# EAGLE board Shield_Engino (EAGLE 9.6.2)
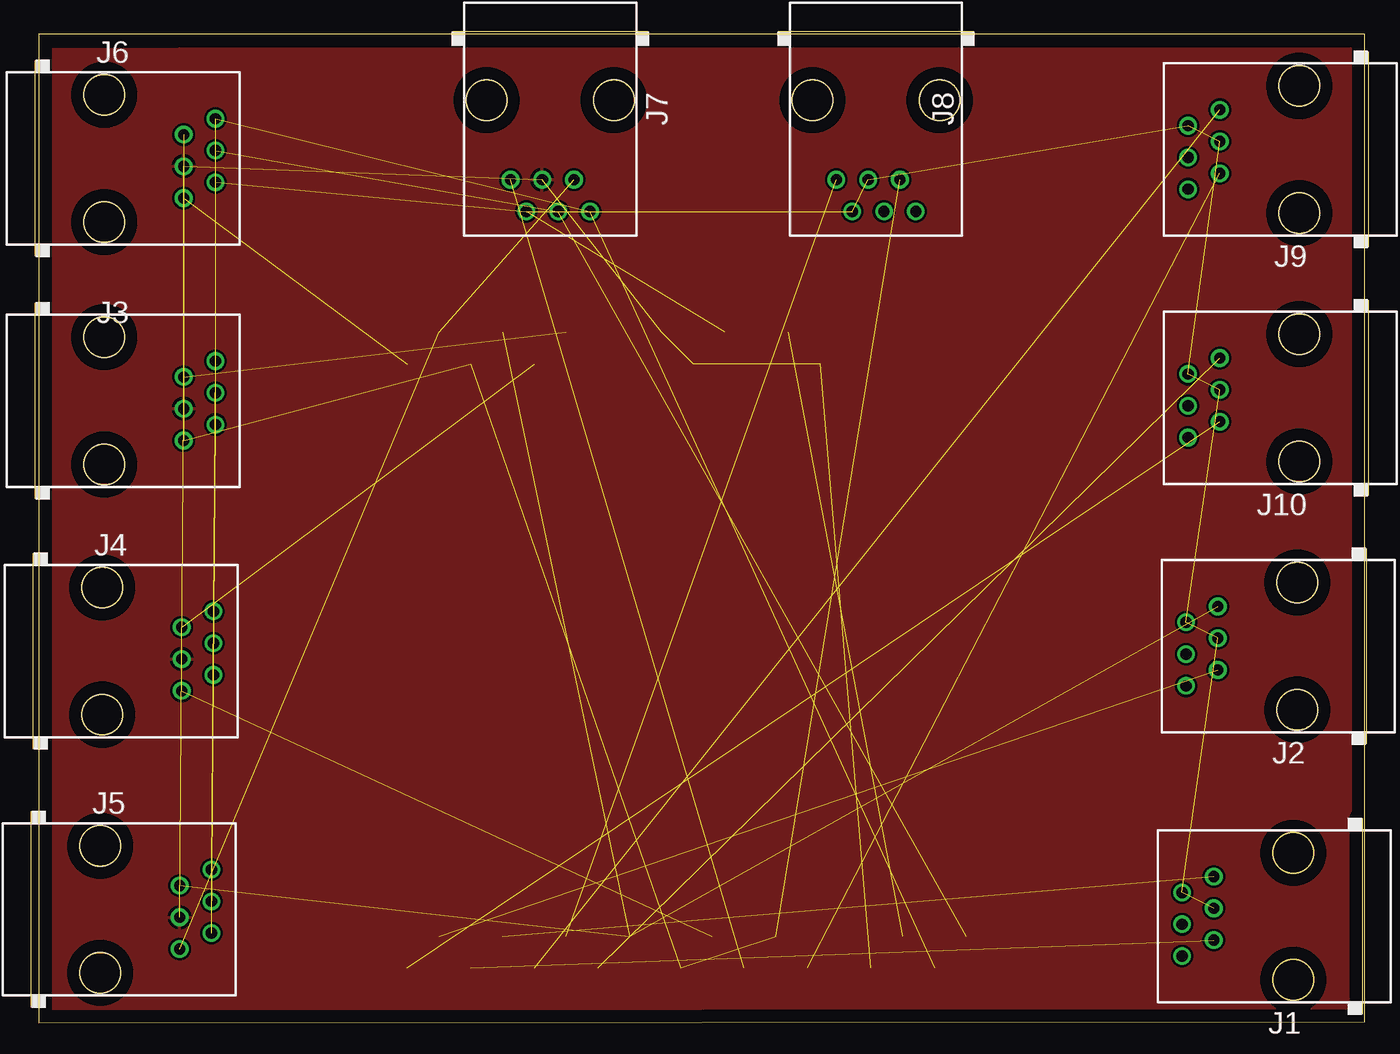
[diagram p0: board, top side]
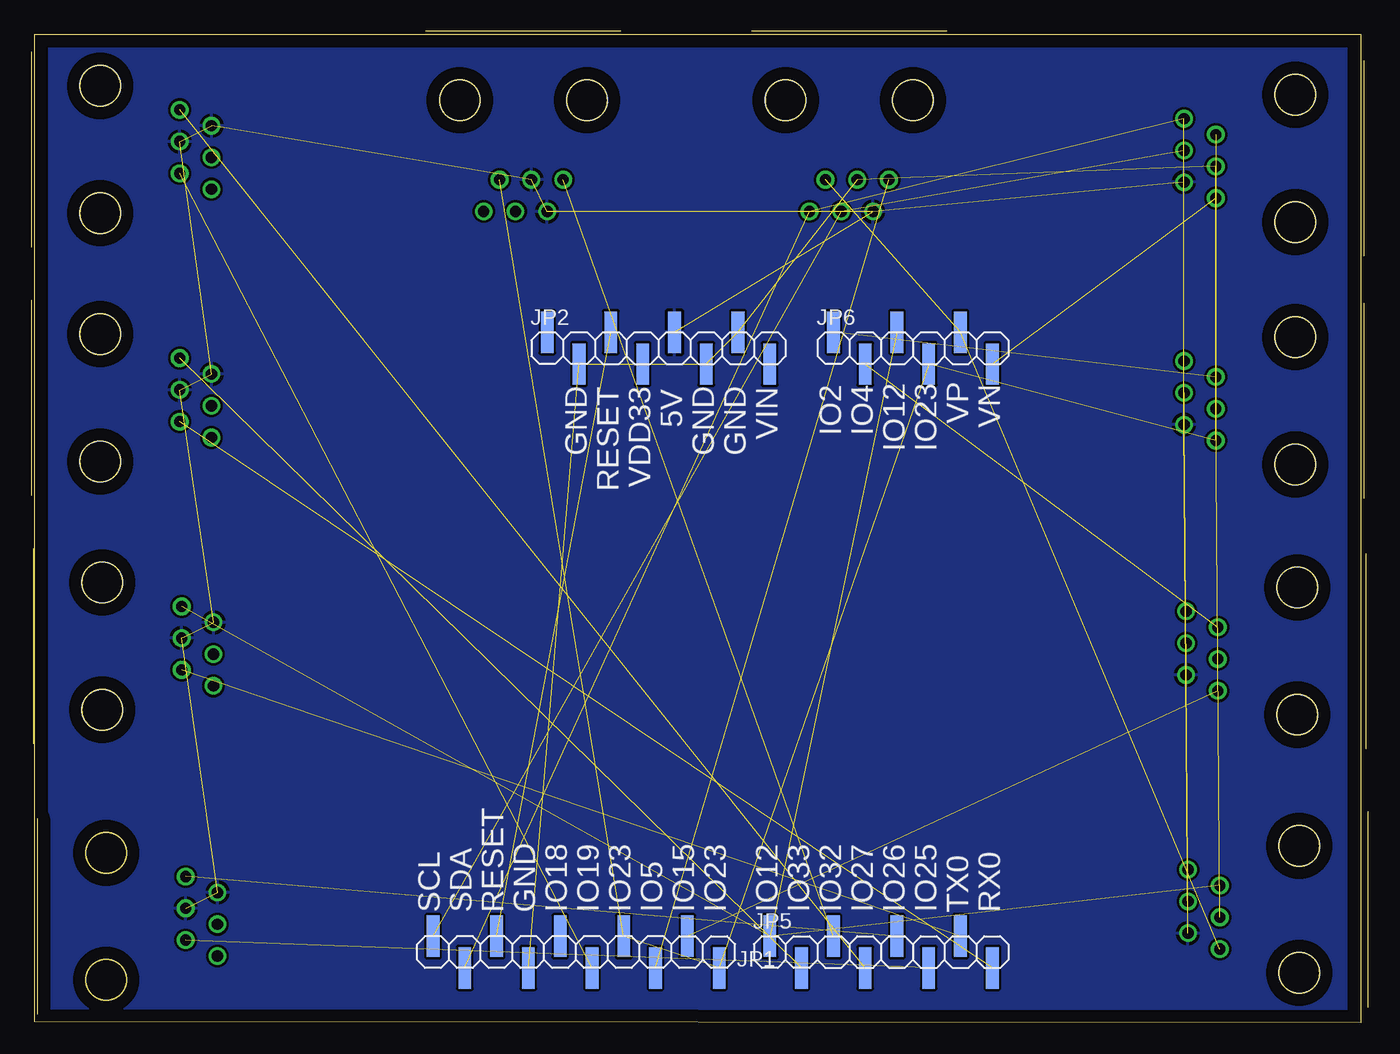
[diagram p1: board, bottom side, seen from below]

Size 105.94 x 78.99 mm. Coordinates in mm from the lower left corner, seen from the top.
Outline: 99.11,44.69 99.12,44.58 99.14,44.48 99.17,44.38 99.2,44.27 99.24,44.18 99.29,44.08 99.35,43.99 99.41,43.9 99.47,43.81 99.54,43.73 99.61,43.66 99.69,43.59 99.78,43.52 99.87,43.47 99.96,43.41 100.05,43.37 100.15,43.32 100.25,43.29 100.36,43.26 100.46,43.24 100.57,43.23 100.67,43.22 100.78,43.22 100.89,43.23 100.99,43.24 101.1,43.26 101.2,43.29 101.3,43.32 101.4,43.37 101.49,43.41 101.59,43.47 101.67,43.52 101.76,43.59 101.84,43.66 101.91,43.73 101.98,43.81 102.05,43.9 102.11,43.99 102.16,44.08 102.21,44.18 102.25,44.27 102.28,44.38 102.31,44.48 102.33,44.58 102.35,44.69 102.35,44.79 102.35,44.9 102.35,45.01 102.33,45.11 102.31,45.22 102.28,45.32 102.25,45.42 102.21,45.52 102.16,45.61 102.11,45.71 102.05,45.8 101.98,45.88 101.91,45.96 101.84,46.03 101.76,46.1 101.67,46.17 101.59,46.23 101.49,46.28 101.4,46.33 101.3,46.37 101.2,46.4 101.1,46.43 100.99,46.45 100.89,46.47 100.78,46.47 100.67,46.47 100.57,46.47 100.46,46.45 100.36,46.43 100.25,46.4 100.15,46.37 100.05,46.33 99.96,46.28 99.87,46.23 99.78,46.17 99.69,46.1 99.61,46.03 99.54,45.96 99.47,45.88 99.43,45.82 99.41,45.8 99.35,45.71 99.29,45.61 99.24,45.52 99.2,45.42 99.17,45.32 99.14,45.22 99.12,45.11 99.11,45.01 99.1,44.9 99.1,44.79 99.11,44.69
Outline: 99.11,44.69 99.11,44.69
Outline: 5.91,72.66 5.81,72.61 5.71,72.58 5.61,72.55 5.5,72.53 5.4,72.52 5.29,72.51 5.19,72.51 5.08,72.52 4.97,72.53 4.87,72.55 4.77,72.58 4.67,72.61 4.57,72.66 4.47,72.7 4.38,72.76 4.29,72.82 4.21,72.88 4.13,72.95 4.05,73.03 3.98,73.11 3.92,73.19 3.86,73.28 3.8,73.37 3.76,73.47 3.72,73.56 3.68,73.66 3.65,73.77 3.63,73.87 3.62,73.98 3.61,74.08 3.61,74.19 3.62,74.3 3.63,74.4 3.65,74.51 3.68,74.61 3.72,74.71 3.76,74.81 3.8,74.9 3.86,75 3.92,75.08 3.98,75.17 4.05,75.25 4.13,75.32 4.21,75.39 4.29,75.46 4.38,75.52 4.47,75.57 4.57,75.62 4.62,75.64 4.67,75.66 4.77,75.69 4.87,75.72 4.97,75.74 5.08,75.76 5.19,75.76 5.29,75.76 5.4,75.76 5.5,75.74 5.61,75.72 5.71,75.69 5.81,75.66 5.91,75.62 6,75.57 6.1,75.52 6.19,75.46 6.27,75.39 6.35,75.32 6.43,75.25 6.5,75.17 6.56,75.08 6.62,75 6.67,74.9 6.72,74.81 6.76,74.71 6.79,74.61 6.82,74.51 6.84,74.4 6.86,74.3 6.86,74.19 6.86,74.08 6.86,73.98 6.84,73.87 6.82,73.77 6.79,73.66 6.76,73.56 6.72,73.47 6.67,73.37 6.62,73.28 6.56,73.19 6.5,73.11 6.43,73.03 6.35,72.95 6.27,72.88 6.19,72.82 6.1,72.76 6,72.7 5.91,72.66
Outline: 5.29,2.38 5.19,2.36 5.08,2.35 4.97,2.34 4.87,2.34 4.76,2.35 4.66,2.36 4.55,2.38 4.45,2.41 4.35,2.45 4.25,2.49 4.15,2.54 4.06,2.59 3.97,2.65 3.89,2.71 3.81,2.78 3.73,2.86 3.66,2.94 3.6,3.02 3.54,3.11 3.49,3.2 3.44,3.3 3.4,3.4 3.37,3.5 3.34,3.6 3.32,3.7 3.3,3.81 3.3,3.92 3.3,4.02 3.3,4.13 3.32,4.23 3.34,4.34 3.37,4.44 3.4,4.54 3.44,4.64 3.49,4.74 3.54,4.83 3.6,4.92 3.66,5 3.73,5.08 3.81,5.16 3.89,5.23 3.97,5.29 4.06,5.35 4.15,5.4 4.25,5.45 4.35,5.49 4.45,5.53 4.55,5.55 4.66,5.57 4.76,5.59 4.87,5.59 4.97,5.59 5.08,5.59 5.19,5.57 5.29,5.55 5.39,5.53 5.49,5.49 5.59,5.45 5.69,5.4 5.78,5.35 5.87,5.29 5.95,5.23 6.03,5.16 6.11,5.08 6.18,5 6.24,4.92 6.3,4.83 6.36,4.74 6.4,4.64 6.44,4.54 6.48,4.44 6.5,4.34 6.53,4.23 6.54,4.13 6.55,4.02 6.55,3.92 6.54,3.81 6.53,3.7 6.5,3.6 6.48,3.5 6.44,3.4 6.4,3.3 6.36,3.2 6.3,3.11 6.24,3.02 6.18,2.94 6.11,2.86 6.03,2.78 5.95,2.71 5.87,2.65 5.78,2.59 5.69,2.54 5.59,2.49 5.49,2.45 5.39,2.41 5.29,2.38
Outline: 5.91,62.49 5.81,62.45 5.71,62.42 5.61,62.39 5.5,62.37 5.4,62.36 5.29,62.35 5.19,62.35 5.08,62.36 4.97,62.37 4.87,62.39 4.77,62.42 4.67,62.45 4.57,62.49 4.47,62.54 4.38,62.59 4.29,62.65 4.21,62.72 4.13,62.79 4.05,62.87 3.98,62.95 3.92,63.03 3.86,63.12 3.8,63.21 3.76,63.3 3.72,63.4 3.68,63.51 3.65,63.61 3.63,63.71 3.62,63.82 3.61,63.92 3.61,64.03 3.62,64.14 3.63,64.24 3.65,64.35 3.68,64.45 3.72,64.55 3.76,64.65 3.8,64.74 3.86,64.84 3.92,64.92 3.98,65.01 4.05,65.09 4.13,65.16 4.21,65.23 4.29,65.3 4.38,65.36 4.47,65.41 4.57,65.46 4.67,65.5 4.77,65.53 4.87,65.56 4.97,65.58 5.08,65.59 5.19,65.6 5.29,65.6 5.4,65.59 5.5,65.58 5.61,65.56 5.71,65.53 5.81,65.5 5.91,65.46 6,65.41 6.1,65.36 6.19,65.3 6.27,65.23 6.35,65.16 6.43,65.09 6.5,65.01 6.56,64.92 6.62,64.84 6.67,64.74 6.72,64.65 6.76,64.55 6.79,64.45 6.82,64.35 6.84,64.24 6.86,64.14 6.86,64.03 6.86,63.92 6.86,63.82 6.84,63.71 6.82,63.61 6.79,63.51 6.76,63.4 6.72,63.3 6.67,63.21 6.62,63.12 6.56,63.03 6.5,62.95 6.43,62.87 6.35,62.79 6.27,62.72 6.19,62.65 6.1,62.59 6,62.54 5.91,62.49
Outline: 6.55,14.08 6.54,13.97 6.53,13.86 6.5,13.76 6.48,13.66 6.44,13.56 6.42,13.51 6.4,13.46 6.36,13.36 6.3,13.27 6.24,13.18 6.18,13.1 6.11,13.02 6.03,12.94 5.95,12.87 5.87,12.81 5.78,12.75 5.69,12.7 5.59,12.65 5.49,12.61 5.39,12.57 5.29,12.54 5.19,12.52 5.08,12.51 4.97,12.5 4.87,12.5 4.76,12.51 4.66,12.52 4.55,12.54 4.45,12.57 4.35,12.61 4.25,12.65 4.15,12.7 4.06,12.75 3.97,12.81 3.89,12.87 3.81,12.94 3.73,13.02 3.66,13.1 3.6,13.18 3.54,13.27 3.49,13.36 3.44,13.46 3.4,13.56 3.37,13.66 3.34,13.76 3.32,13.86 3.3,13.97 3.3,14.08 3.3,14.18 3.3,14.29 3.32,14.39 3.34,14.5 3.37,14.6 3.4,14.7 3.44,14.8 3.49,14.9 3.54,14.99 3.6,15.08 3.66,15.16 3.73,15.24 3.81,15.32 3.89,15.39 3.97,15.45 4.06,15.51 4.15,15.56 4.25,15.61 4.35,15.65 4.45,15.69 4.55,15.71 4.66,15.73 4.76,15.75 4.87,15.76 4.97,15.76 5.08,15.75 5.19,15.73 5.29,15.71 5.39,15.69 5.49,15.65 5.59,15.61 5.69,15.56 5.78,15.51 5.87,15.45 5.95,15.39 6.03,15.32 6.11,15.24 6.18,15.16 6.24,15.08 6.3,14.99 6.36,14.9 6.4,14.8 6.44,14.7 6.48,14.6 6.5,14.5 6.53,14.39 6.54,14.29 6.55,14.18 6.55,14.08
Outline: 5.94,23.23 5.85,23.17 5.75,23.12 5.65,23.08 5.55,23.05 5.45,23.02 5.34,23 5.24,22.99 5.13,22.98 5.03,22.98 4.92,22.99 4.81,23 4.71,23.02 4.61,23.05 4.51,23.08 4.41,23.12 4.31,23.17 4.22,23.23 4.13,23.28 4.05,23.35 3.97,23.42 3.89,23.49 3.82,23.58 3.76,23.66 3.7,23.75 3.65,23.84 3.6,23.94 3.56,24.03 3.52,24.13 3.5,24.24 3.47,24.34 3.46,24.45 3.45,24.55 3.45,24.66 3.46,24.77 3.47,24.87 3.5,24.98 3.52,25.08 3.56,25.18 3.6,25.28 3.65,25.37 3.7,25.47 3.76,25.55 3.82,25.64 3.89,25.72 3.97,25.79 4.05,25.86 4.13,25.93 4.22,25.99 4.31,26.04 4.41,26.09 4.51,26.13 4.61,26.16 4.71,26.19 4.81,26.21 4.92,26.23 5.03,26.23 5.13,26.23 5.24,26.23 5.34,26.21 5.45,26.19 5.55,26.16 5.65,26.13 5.75,26.09 5.85,26.04 5.94,25.99 6.03,25.93 6.11,25.86 6.19,25.79 6.27,25.72 6.34,25.64 6.4,25.55 6.46,25.47 6.51,25.37 6.56,25.28 6.6,25.18 6.64,25.08 6.66,24.98 6.69,24.87 6.7,24.77 6.71,24.66 6.71,24.55 6.7,24.45 6.69,24.34 6.66,24.24 6.64,24.13 6.6,24.03 6.56,23.94 6.51,23.84 6.46,23.75 6.4,23.66 6.34,23.58 6.27,23.49 6.19,23.42 6.11,23.35 6.03,23.28 5.94,23.23
Outline: 5.94,33.38 5.85,33.33 5.75,33.28 5.65,33.24 5.55,33.21 5.45,33.18 5.34,33.16 5.24,33.15 5.13,33.14 5.03,33.14 4.92,33.15 4.81,33.16 4.71,33.18 4.61,33.21 4.51,33.24 4.41,33.28 4.31,33.33 4.22,33.38 4.13,33.44 4.05,33.51 3.97,33.58 3.89,33.66 3.82,33.73 3.76,33.82 3.7,33.91 3.65,34 3.6,34.09 3.56,34.19 3.52,34.3 3.5,34.4 3.47,34.5 3.46,34.61 3.45,34.71 3.45,34.82 3.46,34.93 3.47,35.03 3.5,35.14 3.52,35.24 3.56,35.34 3.6,35.44 3.65,35.53 3.7,35.62 3.76,35.71 3.82,35.8 3.89,35.88 3.97,35.95 4.05,36.02 4.13,36.09 4.22,36.15 4.31,36.2 4.41,36.25 4.51,36.29 4.61,36.32 4.71,36.35 4.81,36.37 4.92,36.38 5.03,36.39 5.13,36.39 5.24,36.38 5.34,36.37 5.45,36.35 5.55,36.32 5.65,36.29 5.75,36.25 5.85,36.2 5.94,36.15 6.03,36.09 6.11,36.02 6.19,35.95 6.27,35.88 6.34,35.8 6.4,35.71 6.46,35.62 6.51,35.53 6.56,35.44 6.6,35.34 6.64,35.24 6.66,35.14 6.69,35.03 6.7,34.93 6.71,34.82 6.71,34.71 6.7,34.61 6.69,34.5 6.66,34.4 6.64,34.3 6.6,34.19 6.56,34.09 6.51,34 6.46,33.91 6.4,33.82 6.34,33.73 6.27,33.66 6.19,33.58 6.11,33.51 6.03,33.44 5.94,33.38
Outline: 5.91,43.13 5.81,43.09 5.71,43.05 5.61,43.02 5.5,43 5.4,42.99 5.29,42.98 5.19,42.98 5.08,42.99 4.97,43 4.87,43.02 4.77,43.05 4.67,43.09 4.57,43.13 4.47,43.17 4.38,43.23 4.29,43.29 4.21,43.35 4.13,43.42 4.05,43.5 3.98,43.58 3.92,43.66 3.86,43.75 3.8,43.84 3.76,43.94 3.72,44.04 3.68,44.14 3.65,44.24 3.63,44.34 3.62,44.45 3.61,44.56 3.61,44.66 3.62,44.77 3.63,44.87 3.65,44.98 3.68,45.08 3.72,45.18 3.76,45.28 3.8,45.38 3.86,45.47 3.92,45.56 3.98,45.64 4.05,45.72 4.13,45.8 4.21,45.87 4.29,45.93 4.38,45.99 4.47,46.04 4.57,46.09 4.67,46.13 4.77,46.17 4.87,46.19 4.97,46.21 5.08,46.23 5.19,46.23 5.29,46.23 5.4,46.23 5.5,46.21 5.61,46.19 5.71,46.17 5.81,46.13 5.91,46.09 6,46.04 6.1,45.99 6.19,45.93 6.27,45.87 6.35,45.8 6.43,45.72 6.5,45.64 6.56,45.56 6.62,45.47 6.67,45.38 6.72,45.28 6.76,45.18 6.79,45.08 6.82,44.98 6.84,44.87 6.86,44.77 6.86,44.66 6.86,44.56 6.86,44.45 6.84,44.34 6.82,44.24 6.79,44.14 6.76,44.04 6.72,43.94 6.67,43.84 6.62,43.75 6.56,43.66 6.5,43.58 6.43,43.5 6.35,43.42 6.27,43.35 6.19,43.29 6.1,43.23 6,43.17 5.91,43.13
Outline: 5.91,53.29 5.81,53.25 5.71,53.21 5.61,53.18 5.5,53.16 5.4,53.15 5.29,53.14 5.19,53.14 5.08,53.15 4.97,53.16 4.87,53.18 4.77,53.21 4.67,53.25 4.57,53.29 4.47,53.34 4.38,53.39 4.29,53.45 4.21,53.51 4.13,53.58 4.05,53.66 3.98,53.74 3.92,53.82 3.86,53.91 3.8,54 3.76,54.1 3.72,54.2 3.68,54.3 3.65,54.4 3.63,54.5 3.62,54.61 3.61,54.72 3.61,54.82 3.62,54.93 3.63,55.03 3.65,55.14 3.68,55.24 3.72,55.34 3.76,55.44 3.8,55.54 3.86,55.63 3.92,55.72 3.98,55.8 4.05,55.88 4.13,55.96 4.21,56.03 4.29,56.09 4.38,56.15 4.47,56.2 4.57,56.25 4.67,56.29 4.77,56.33 4.87,56.35 4.97,56.37 5.08,56.39 5.19,56.39 5.29,56.39 5.4,56.39 5.5,56.37 5.61,56.35 5.71,56.33 5.81,56.29 5.91,56.25 6,56.2 6.1,56.15 6.19,56.09 6.27,56.03 6.35,55.96 6.43,55.88 6.5,55.8 6.56,55.72 6.62,55.63 6.67,55.54 6.72,55.44 6.76,55.34 6.79,55.24 6.82,55.14 6.84,55.03 6.86,54.93 6.86,54.82 6.86,54.72 6.86,54.61 6.84,54.5 6.82,54.4 6.79,54.3 6.76,54.2 6.72,54.1 6.67,54 6.62,53.91 6.56,53.82 6.5,53.74 6.43,53.66 6.35,53.58 6.27,53.51 6.19,53.45 6.1,53.39 6,53.34 5.91,53.29
Outline: 99.29,55.77 99.34,55.86 99.35,55.87 99.41,55.95 99.47,56.04 99.54,56.12 99.61,56.19 99.69,56.27 99.71,56.27 99.78,56.33 99.87,56.39 99.96,56.44 100.05,56.49 100.15,56.53 100.25,56.56 100.36,56.59 100.46,56.61 100.57,56.63 100.59,56.63 100.67,56.63 100.78,56.63 100.89,56.63 100.99,56.61 101.1,56.59 101.2,56.56 101.3,56.53 101.4,56.49 101.49,56.44 101.59,56.39 101.67,56.33 101.76,56.27 101.84,56.19 101.91,56.12 101.98,56.04 102.05,55.95 102.11,55.87 102.16,55.77 102.21,55.68 102.25,55.58 102.28,55.48 102.31,55.38 102.33,55.27 102.35,55.17 102.35,55.06 102.35,54.95 102.35,54.85 102.33,54.74 102.31,54.64 102.28,54.53 102.25,54.43 102.21,54.34 102.16,54.24 102.11,54.15 102.05,54.06 101.98,53.98 101.91,53.89 101.84,53.82 101.76,53.75 101.67,53.68 101.59,53.63 101.57,53.62 101.49,53.57 101.4,53.53 101.3,53.48 101.2,53.45 101.1,53.42 100.99,53.4 100.89,53.39 100.78,53.38 100.67,53.38 100.57,53.39 100.46,53.4 100.36,53.42 100.25,53.45 100.15,53.48 100.05,53.53 99.96,53.57 99.87,53.63 99.78,53.68 99.69,53.75 99.61,53.82 99.54,53.89 99.47,53.98 99.41,54.06 99.35,54.15 99.29,54.24 99.24,54.34 99.2,54.43 99.17,54.53 99.14,54.64 99.12,54.74 99.11,54.85 99.1,54.95 99.1,55.06 99.11,55.17 99.12,55.27 99.14,55.38 99.17,55.48 99.2,55.58 99.24,55.68 99.29,55.77
Outline: 101.4,66.17 101.49,66.12 101.59,66.07 101.67,66.01 101.76,65.95 101.84,65.88 101.91,65.8 101.98,65.72 102.05,65.64 102.11,65.55 102.16,65.46 102.21,65.36 102.25,65.26 102.28,65.16 102.31,65.06 102.33,64.96 102.35,64.85 102.35,64.74 102.35,64.64 102.35,64.53 102.33,64.43 102.31,64.32 102.28,64.22 102.25,64.12 102.21,64.02 102.16,63.92 102.11,63.83 102.05,63.74 101.98,63.66 101.91,63.58 101.84,63.5 101.76,63.43 101.67,63.37 101.59,63.31 101.49,63.26 101.4,63.21 101.3,63.17 101.2,63.13 101.1,63.11 100.99,63.09 100.89,63.07 100.78,63.07 100.67,63.07 100.57,63.07 100.46,63.09 100.36,63.11 100.25,63.13 100.15,63.17 100.05,63.21 99.96,63.26 99.87,63.31 99.78,63.37 99.69,63.43 99.61,63.5 99.54,63.58 99.47,63.66 99.41,63.74 99.35,63.83 99.29,63.92 99.24,64.02 99.2,64.12 99.17,64.22 99.14,64.32 99.12,64.43 99.11,64.53 99.1,64.64 99.1,64.74 99.11,64.85 99.12,64.96 99.14,65.06 99.17,65.16 99.2,65.26 99.24,65.36 99.29,65.46 99.35,65.55 99.41,65.64 99.47,65.72 99.54,65.8 99.61,65.88 99.69,65.95 99.78,66.01 99.87,66.07 99.96,66.12 100.05,66.17 100.15,66.21 100.25,66.25 100.36,66.28 100.46,66.3 100.57,66.31 100.67,66.32 100.78,66.32 100.89,66.31 100.99,66.3 101.1,66.28 101.2,66.25 101.3,66.21 101.4,66.17
Outline: 44.33,73.66 44.33,73.76 44.34,73.87 44.35,73.97 44.37,74.08 44.4,74.18 44.44,74.28 44.48,74.38 44.52,74.48 44.58,74.57 44.64,74.66 44.7,74.74 44.77,74.82 44.85,74.9 44.93,74.97 45.01,75.03 45.1,75.09 45.19,75.14 45.29,75.19 45.39,75.23 45.49,75.26 45.59,75.29 45.69,75.31 45.8,75.33 45.91,75.33 46.01,75.33 46.12,75.33 46.22,75.31 46.33,75.29 46.43,75.26 46.53,75.23 46.63,75.19 46.72,75.14 46.82,75.09 46.91,75.03 46.99,74.97 47.07,74.9 47.14,74.82 47.22,74.74 47.28,74.66 47.34,74.57 47.39,74.48 47.44,74.38 47.48,74.28 47.51,74.18 47.54,74.08 47.56,73.97 47.58,73.87 47.58,73.76 47.58,73.66 47.58,73.55 47.56,73.44 47.54,73.34 47.51,73.24 47.48,73.14 47.44,73.04 47.39,72.94 47.34,72.85 47.28,72.76 47.22,72.68 47.14,72.6 47.07,72.52 46.99,72.45 46.91,72.39 46.82,72.33 46.72,72.27 46.63,72.23 46.53,72.19 46.43,72.15 46.33,72.12 46.22,72.1 46.12,72.09 46.01,72.08 45.91,72.08 45.8,72.09 45.69,72.1 45.59,72.12 45.49,72.15 45.39,72.19 45.29,72.23 45.19,72.27 45.1,72.33 45.01,72.39 44.93,72.45 44.85,72.52 44.77,72.6 44.7,72.68 44.64,72.76 44.58,72.85 44.52,72.94 44.48,73.04 44.44,73.14 44.4,73.24 44.37,73.34 44.35,73.44 44.34,73.55 44.33,73.66
Outline: 60.21,73.66 60.21,73.76 60.21,73.87 60.23,73.97 60.25,74.08 60.28,74.18 60.31,74.28 60.35,74.38 60.4,74.48 60.45,74.57 60.51,74.66 60.58,74.74 60.65,74.82 60.72,74.9 60.8,74.97 60.89,75.03 60.97,75.09 61.07,75.14 61.16,75.19 61.26,75.23 61.36,75.26 61.46,75.29 61.57,75.31 61.67,75.33 61.78,75.33 61.89,75.33 61.99,75.33 62.1,75.31 62.2,75.29 62.3,75.26 62.41,75.23 62.5,75.19 62.6,75.14 62.69,75.09 62.78,75.03 62.86,74.97 62.94,74.9 63.02,74.82 63.09,74.74 63.16,74.66 63.21,74.57 63.27,74.48 63.31,74.38 63.35,74.28 63.39,74.18 63.42,74.08 63.44,73.97 63.45,73.87 63.46,73.76 63.46,73.66 63.45,73.55 63.44,73.44 63.42,73.34 63.39,73.24 63.35,73.14 63.31,73.04 63.27,72.94 63.21,72.85 63.16,72.76 63.09,72.68 63.02,72.6 62.94,72.52 62.86,72.45 62.78,72.39 62.69,72.33 62.6,72.27 62.5,72.23 62.41,72.19 62.3,72.15 62.2,72.12 62.1,72.1 61.99,72.09 61.89,72.08 61.78,72.08 61.67,72.09 61.57,72.1 61.46,72.12 61.36,72.15 61.26,72.19 61.16,72.23 61.07,72.27 60.97,72.33 60.89,72.39 60.8,72.45 60.72,72.52 60.65,72.6 60.58,72.68 60.51,72.76 60.45,72.85 60.4,72.94 60.35,73.04 60.31,73.14 60.28,73.24 60.25,73.34 60.23,73.44 60.21,73.55 60.21,73.66
Outline: 98.94,24.95 98.94,25.06 98.95,25.16 98.96,25.27 98.98,25.37 99.01,25.48 99.05,25.58 99.09,25.67 99.13,25.77 99.19,25.86 99.25,25.95 99.31,26.03 99.38,26.12 99.46,26.19 99.54,26.26 99.62,26.33 99.71,26.38 99.8,26.44 99.9,26.48 99.99,26.53 100.1,26.56 100.2,26.59 100.3,26.61 100.41,26.62 100.52,26.63 100.62,26.63 100.73,26.62 100.83,26.61 100.94,26.59 101.04,26.56 101.14,26.53 101.24,26.48 101.33,26.44 101.43,26.38 101.52,26.33 101.6,26.26 101.68,26.19 101.75,26.12 101.83,26.03 101.89,25.95 101.95,25.86 102,25.77 102.05,25.67 102.09,25.58 102.12,25.48 102.15,25.37 102.17,25.27 102.19,25.16 102.19,25.06 102.19,24.95 102.19,24.84 102.17,24.74 102.15,24.63 102.12,24.53 102.09,24.43 102.05,24.33 102,24.24 101.95,24.15 101.89,24.06 101.83,23.97 101.75,23.89 101.68,23.82 101.6,23.75 101.52,23.68 101.43,23.62 101.33,23.57 101.24,23.52 101.14,23.48 101.04,23.45 100.94,23.42 100.83,23.4 100.73,23.38 100.62,23.38 100.52,23.38 100.41,23.38 100.3,23.4 100.2,23.42 100.1,23.45 99.99,23.48 99.9,23.52 99.8,23.57 99.71,23.62 99.62,23.68 99.54,23.75 99.46,23.82 99.38,23.89 99.31,23.97 99.25,24.06 99.19,24.15 99.13,24.24 99.09,24.33 99.05,24.43 99.01,24.53 98.98,24.63 98.96,24.74 98.95,24.84 98.94,24.95
Outline: 34.17,73.66 34.17,73.76 34.18,73.87 34.19,73.97 34.21,74.08 34.24,74.18 34.28,74.28 34.32,74.38 34.36,74.48 34.42,74.57 34.48,74.66 34.54,74.74 34.61,74.82 34.69,74.9 34.77,74.97 34.85,75.03 34.94,75.09 35.03,75.14 35.13,75.19 35.22,75.23 35.33,75.26 35.43,75.29 35.53,75.31 35.64,75.33 35.75,75.33 35.85,75.33 35.96,75.33 36.06,75.31 36.17,75.29 36.27,75.26 36.37,75.23 36.47,75.19 36.56,75.14 36.66,75.09 36.75,75.03 36.83,74.97 36.91,74.9 36.98,74.82 37.05,74.74 37.12,74.66 37.18,74.57 37.23,74.48 37.28,74.38 37.32,74.28 37.35,74.18 37.38,74.08 37.4,73.97 37.42,73.87 37.42,73.76 37.42,73.66 37.42,73.55 37.4,73.44 37.38,73.34 37.35,73.24 37.32,73.14 37.28,73.04 37.23,72.94 37.18,72.85 37.12,72.76 37.05,72.68 36.98,72.6 36.91,72.52 36.83,72.45 36.75,72.39 36.66,72.33 36.56,72.27 36.47,72.23 36.37,72.19 36.27,72.15 36.17,72.12 36.06,72.1 35.96,72.09 35.85,72.08 35.75,72.08 35.64,72.09 35.53,72.1 35.43,72.12 35.33,72.15 35.22,72.19 35.13,72.23 35.03,72.27 34.94,72.33 34.85,72.39 34.77,72.45 34.69,72.52 34.61,72.6 34.54,72.68 34.48,72.76 34.42,72.85 34.36,72.94 34.32,73.04 34.28,73.14 34.24,73.24 34.21,73.34 34.19,73.44 34.18,73.55 34.17,73.66
Outline: 98.94,35.11 98.94,35.22 98.95,35.32 98.96,35.43 98.98,35.53 99.01,35.64 99.05,35.74 99.09,35.84 99.13,35.93 99.19,36.02 99.25,36.11 99.31,36.2 99.38,36.27 99.46,36.35 99.54,36.42 99.62,36.49 99.71,36.55 99.8,36.6 99.9,36.64 99.99,36.69 100.1,36.72 100.2,36.75 100.3,36.77 100.41,36.78 100.52,36.79 100.62,36.79 100.73,36.78 100.83,36.77 100.94,36.75 101.04,36.72 101.14,36.69 101.24,36.64 101.33,36.6 101.43,36.55 101.52,36.49 101.6,36.42 101.68,36.35 101.75,36.27 101.83,36.2 101.89,36.11 101.95,36.02 102,35.93 102.05,35.84 102.09,35.74 102.12,35.64 102.15,35.53 102.17,35.43 102.19,35.32 102.19,35.22 102.19,35.11 102.19,35 102.17,34.9 102.15,34.79 102.12,34.69 102.09,34.59 102.05,34.49 102,34.4 101.95,34.3 101.89,34.22 101.83,34.13 101.75,34.05 101.68,33.98 101.6,33.91 101.52,33.84 101.43,33.78 101.33,33.73 101.24,33.68 101.14,33.64 101.04,33.61 100.94,33.58 100.83,33.56 100.73,33.55 100.62,33.54 100.52,33.54 100.41,33.55 100.3,33.56 100.2,33.58 100.1,33.61 99.99,33.64 99.9,33.68 99.8,33.73 99.71,33.78 99.62,33.84 99.54,33.91 99.46,33.98 99.38,34.05 99.31,34.13 99.25,34.22 99.19,34.3 99.13,34.4 99.09,34.49 99.05,34.59 99.01,34.69 98.98,34.79 98.96,34.9 98.95,35 98.94,35.11
Outline: 70.37,73.66 70.37,73.76 70.37,73.87 70.39,73.97 70.41,74.08 70.44,74.18 70.47,74.28 70.51,74.38 70.56,74.48 70.61,74.57 70.67,74.66 70.74,74.74 70.81,74.82 70.88,74.9 70.96,74.97 71.05,75.03 71.13,75.09 71.23,75.14 71.32,75.19 71.42,75.23 71.52,75.26 71.62,75.29 71.73,75.31 71.83,75.33 71.94,75.33 72.05,75.33 72.15,75.33 72.26,75.31 72.36,75.29 72.46,75.26 72.57,75.23 72.66,75.19 72.76,75.14 72.85,75.09 72.94,75.03 73.02,74.97 73.1,74.9 73.18,74.82 73.25,74.74 73.31,74.66 73.37,74.57 73.43,74.48 73.47,74.38 73.52,74.28 73.55,74.18 73.58,74.08 73.6,73.97 73.61,73.87 73.62,73.76 73.62,73.66 73.61,73.55 73.6,73.44 73.58,73.34 73.55,73.24 73.52,73.14 73.47,73.04 73.43,72.94 73.37,72.85 73.31,72.76 73.25,72.68 73.18,72.6 73.1,72.52 73.02,72.45 72.94,72.39 72.85,72.33 72.76,72.27 72.66,72.23 72.57,72.19 72.46,72.15 72.36,72.12 72.26,72.1 72.15,72.09 72.05,72.08 71.94,72.08 71.83,72.09 71.73,72.1 71.62,72.12 71.52,72.15 71.42,72.19 71.32,72.23 71.23,72.27 71.13,72.33 71.05,72.39 70.96,72.45 70.88,72.52 70.81,72.6 70.74,72.68 70.67,72.76 70.61,72.85 70.56,72.94 70.51,73.04 70.47,73.14 70.44,73.24 70.41,73.34 70.39,73.44 70.37,73.55 70.37,73.66
Outline: 101.4,76.33 101.49,76.29 101.59,76.23 101.67,76.17 101.76,76.11 101.84,76.04 101.91,75.96 101.98,75.88 102.05,75.8 102.11,75.71 102.16,75.62 102.21,75.52 102.25,75.42 102.28,75.32 102.31,75.22 102.33,75.12 102.35,75.01 102.35,74.9 102.35,74.8 102.35,74.69 102.33,74.59 102.31,74.48 102.28,74.38 102.25,74.28 102.21,74.18 102.16,74.08 102.11,73.99 102.05,73.9 101.98,73.82 101.91,73.74 101.84,73.66 101.76,73.59 101.67,73.53 101.59,73.47 101.49,73.42 101.4,73.37 101.3,73.33 101.2,73.3 101.1,73.27 100.99,73.25 100.89,73.23 100.78,73.23 100.67,73.23 100.57,73.23 100.46,73.25 100.36,73.27 100.25,73.3 100.15,73.33 100.05,73.37 99.96,73.42 99.87,73.47 99.78,73.53 99.69,73.59 99.61,73.66 99.54,73.74 99.47,73.82 99.41,73.9 99.35,73.99 99.29,74.08 99.24,74.18 99.2,74.28 99.17,74.38 99.14,74.48 99.12,74.59 99.11,74.69 99.1,74.8 99.1,74.9 99.11,75.01 99.12,75.12 99.14,75.22 99.17,75.32 99.2,75.42 99.24,75.52 99.29,75.62 99.35,75.71 99.41,75.8 99.47,75.88 99.54,75.96 99.61,76.04 99.69,76.11 99.78,76.17 99.87,76.23 99.96,76.29 100.05,76.33 100.15,76.37 100.25,76.41 100.36,76.44 100.46,76.46 100.57,76.47 100.67,76.48 100.78,76.48 100.89,76.47 100.99,76.46 101.1,76.44 101.2,76.41 101.3,76.37 101.4,76.33
Outline: 0,78.99 0,0 105.94,0.08 105.94,78.99 0,78.99
Outline: circle at 100.25,3.41 radius 1.63
Outline: circle at 100.25,13.57 radius 1.63
Copper layers (1*16): Top 0.035mm / dielectric 1.5mm / Bottom 0.035mm
Design rules "default *": minimum track width 6mil, minimum drill 0.35mm, track to track 8mil, track to pad 8mil, pad to pad 8mil, via to via 6mil, smd to smd 6mil, copper to edge 40mil, drill to drill 6mil, minimum pad ring 10mil, minimum via ring 8mil, stop-mask expansion 4mil, vias tented up to drill 0mil, thermal gap 10mil
Net classes: 0 default: width 0.813 mm, drill 0.6 mm

## Footprints (pad centres in the part's own frame; a part is rotated, then mirrored left to right if it is on the bottom)
ARDUINO_R3 = drill 1.016 pad 1.93: 3.3V 2.54,-24.13; 5V 5.08,-24.13; A0 17.78,-24.13; A1 20.32,-24.13; A2 22.86,-24.13; A3 25.4,-24.13; A4 27.94,-24.13; A5 30.48,-24.13; AREF -9.144,24.13; D0 30.48,24.13; D1 27.94,24.13; D2 25.4,24.13; D3 22.86,24.13; D4 20.32,24.13; D5 17.78,24.13; D6 15.24,24.13; D7 12.7,24.13; D8 8.636,24.13; D9 6.096,24.13; D10 3.556,24.13; D11 1.016,24.13; D12 -1.524,24.13; D13 -4.064,24.13; GND@1 7.62,-24.13; GND@2 10.16,-24.13; GND@3 -6.604,24.13; GND@4 33.16,-1.32; IOREF -2.54,-24.13; MISO 30.62,3.76; MOSI 33.16,1.22; NC -5.08,-24.13; RESET@1 0,-24.13; RESET@2 30.62,-1.32; SCK 30.62,1.22; SCL -14.224,24.13; SDA -11.684,24.13; VCC 33.16,3.76; VIN 12.7,-24.13 | hole 3.175: -17.78,24.13; 33.02,8.89; 33.02,-19.05; -19.05,-24.13
RJ11-NO_SHIELD = drill 0.9 pad 1.4: 1 -3.175,8.89; 2 -1.905,6.35; 3 -0.635,8.89; 4 0.635,6.35; 5 1.905,8.89; 6 3.175,6.35 | hole 3.251: -5.08,0; 5.08,0
1X10SMD = smd 1.016 x 3.302: 1 -1.27,1.27; 2 1.27,-1.27; 3 3.81,1.27; 4 6.35,-1.27; 5 8.89,1.27; 6 11.43,-1.27; 7 13.97,1.27; 8 16.51,-1.27; 9 19.05,1.27; 10 21.59,-1.27
1X08SMD = smd 1.016 x 3.302: 1 -1.27,1.27; 2 1.27,-1.27; 3 3.81,1.27; 4 6.35,-1.27; 5 8.89,1.27; 6 11.43,-1.27; 7 13.97,1.27; 8 16.51,-1.27
1X06SMD = smd 1.016 x 3.302: 1 -1.27,1.27; 2 1.27,-1.27; 3 3.81,1.27; 4 6.35,-1.27; 5 8.89,1.27; 6 11.43,-1.27

## Placement (x,y rotation side)
B1  ARDUINO_UNO_R3  [ARDUINO_R3]  147.08,28.81 180 top  (outside the outline)
J1  RJ11-2L-B  [RJ11-NO_SHIELD]  100.25,8.49 90 top
J2  RJ11-2L-B  [RJ11-NO_SHIELD]  100.57,30.08 90 top
J3  RJ11-2L-B  [RJ11-NO_SHIELD]  5.24,49.69 270 top
J4  RJ11-2L-B  [RJ11-NO_SHIELD]  5.08,29.69 270 top
J5  RJ11-2L-B  [RJ11-NO_SHIELD]  4.92,9.05 270 top
J6  RJ11-2L-B  [RJ11-NO_SHIELD]  5.24,69.06 270 top
J7  RJ11-2L-B  [RJ11-NO_SHIELD]  40.88,73.71 180 top
J8  RJ11-2L-B  [RJ11-NO_SHIELD]  66.91,73.71 180 top
J9  RJ11-2L-B  [RJ11-NO_SHIELD]  100.73,69.77 90 top
J10  RJ11-2L-B  [RJ11-NO_SHIELD]  100.73,49.93 90 top
JP1  [1X10SMD]  52.55,5.64 180 bottom
JP2  [1X08SMD]  63.74,53.9 0 bottom
JP5  [1X08SMD]  45.96,5.64 0 bottom
JP6  [1X06SMD]  40.88,53.9 0 bottom

## Library data of the parts
B1 = SparkFun-Boards
J1-J10 = con-tycoelectronics; MF: TYCO ELECTRONICS; MPN: RJ11-2L-B; OC_FARNELL: unknown; OC_NEWARK: 83F4463
JP1 JP2 JP5 JP6 = pinhead-1

## Nets
5V: J1.4 J1.5 J2.4 J2.5 J3.5 J4.5 J5.5 J6.5 J7.5 J8.4 J8.5 J9.4 J9.5 J10.4 J10.5 JP2.5
GND: J3.4 J4.4 J5.4 J6.4 J7.4 JP1.7 JP2.2 JP2.6 JP2.7
I2C_SCL~5V: J3.3 J4.3 J5.3 J6.3 J7.3 JP1.10
I2C_SDA~5V: J3.1 J4.1 J5.1 J6.1 J7.1 JP1.9
IO2: J3.2 JP6.1
IO4: J4.2 JP6.2
IO5: J7.6 JP1.3
IO12: J2.6 J5.2 JP5.1 JP6.3
IO15: J4.6 JP1.2
IO18: JP1.6
IO19: J9.2 JP1.5
IO23: J3.6 J6.2 J8.2 JP1.1 JP1.4 JP6.4
IO25: J1.2 JP5.6
IO26: J1.6 JP5.5
IO27: J9.6 JP5.4
IO32: J8.6 JP5.3
IO33: J10.6 JP5.2
RESET: JP1.8 JP2.3
RX0: J10.2 JP5.8
TX0: J2.2 JP5.7
VDD33: JP2.4
VIN: JP2.8
VN_SENSOR_IN: J6.6 JP6.6
VP_SENSOR_IN: J5.6 J7.2 JP6.5

## Tracks (layer width: path | path; a pad name or v marks a point on that pad's centre or on a via)
5V  (15 unrouted)
  pour Bottom: 1.11,77.95 105.01,77.95 105.01,0.56 1.11,0.56
GND  (8 unrouted)
  pour Top: 0.71,77.79 0.71,0.4 8.49,0.4 105.49,0.4 105.49,1.59 105.49,78.18 105.01,78.18
I2C_SCL~5V  (5 unrouted)
I2C_SDA~5V  (5 unrouted)
IO2  (1 unrouted)
IO4  (1 unrouted)
IO5  (1 unrouted)
IO12  (3 unrouted)
IO15  (1 unrouted)
IO19  (1 unrouted)
IO23  (5 unrouted)
IO25  (1 unrouted)
IO26  (1 unrouted)
IO27  (1 unrouted)
IO32  (1 unrouted)
IO33  (1 unrouted)
RESET  (1 unrouted)
RX0  (1 unrouted)
TX0  (1 unrouted)
VN_SENSOR_IN  (1 unrouted)
VP_SENSOR_IN  (2 unrouted)

## Text on the board
bNames: VN | VP | 5V | IO4 | IO2 | VIN | IO23 | IO12 | GND | GND | GND | VDD33 | RESET | RX0 | TX0 | IO25 | IO26 | IO27 | IO32 | IO33 | IO12 | IO23 | IO15 | IO5 | IO23 | IO19 | IO18 | GND | RESET | SDA | SCL